# Altium PCB Hecquyn_PCB_Proto1_210521.PcbDoc
Units mil, origin at the board's own origin, x right, y up, seen from the top; angles counter-clockwise.
Board outline 1694 x 2355.81 mil, 2 copper layers (Top Layer, Bottom Layer); 39 components, 61 nets, 182 pads, 34 vias.
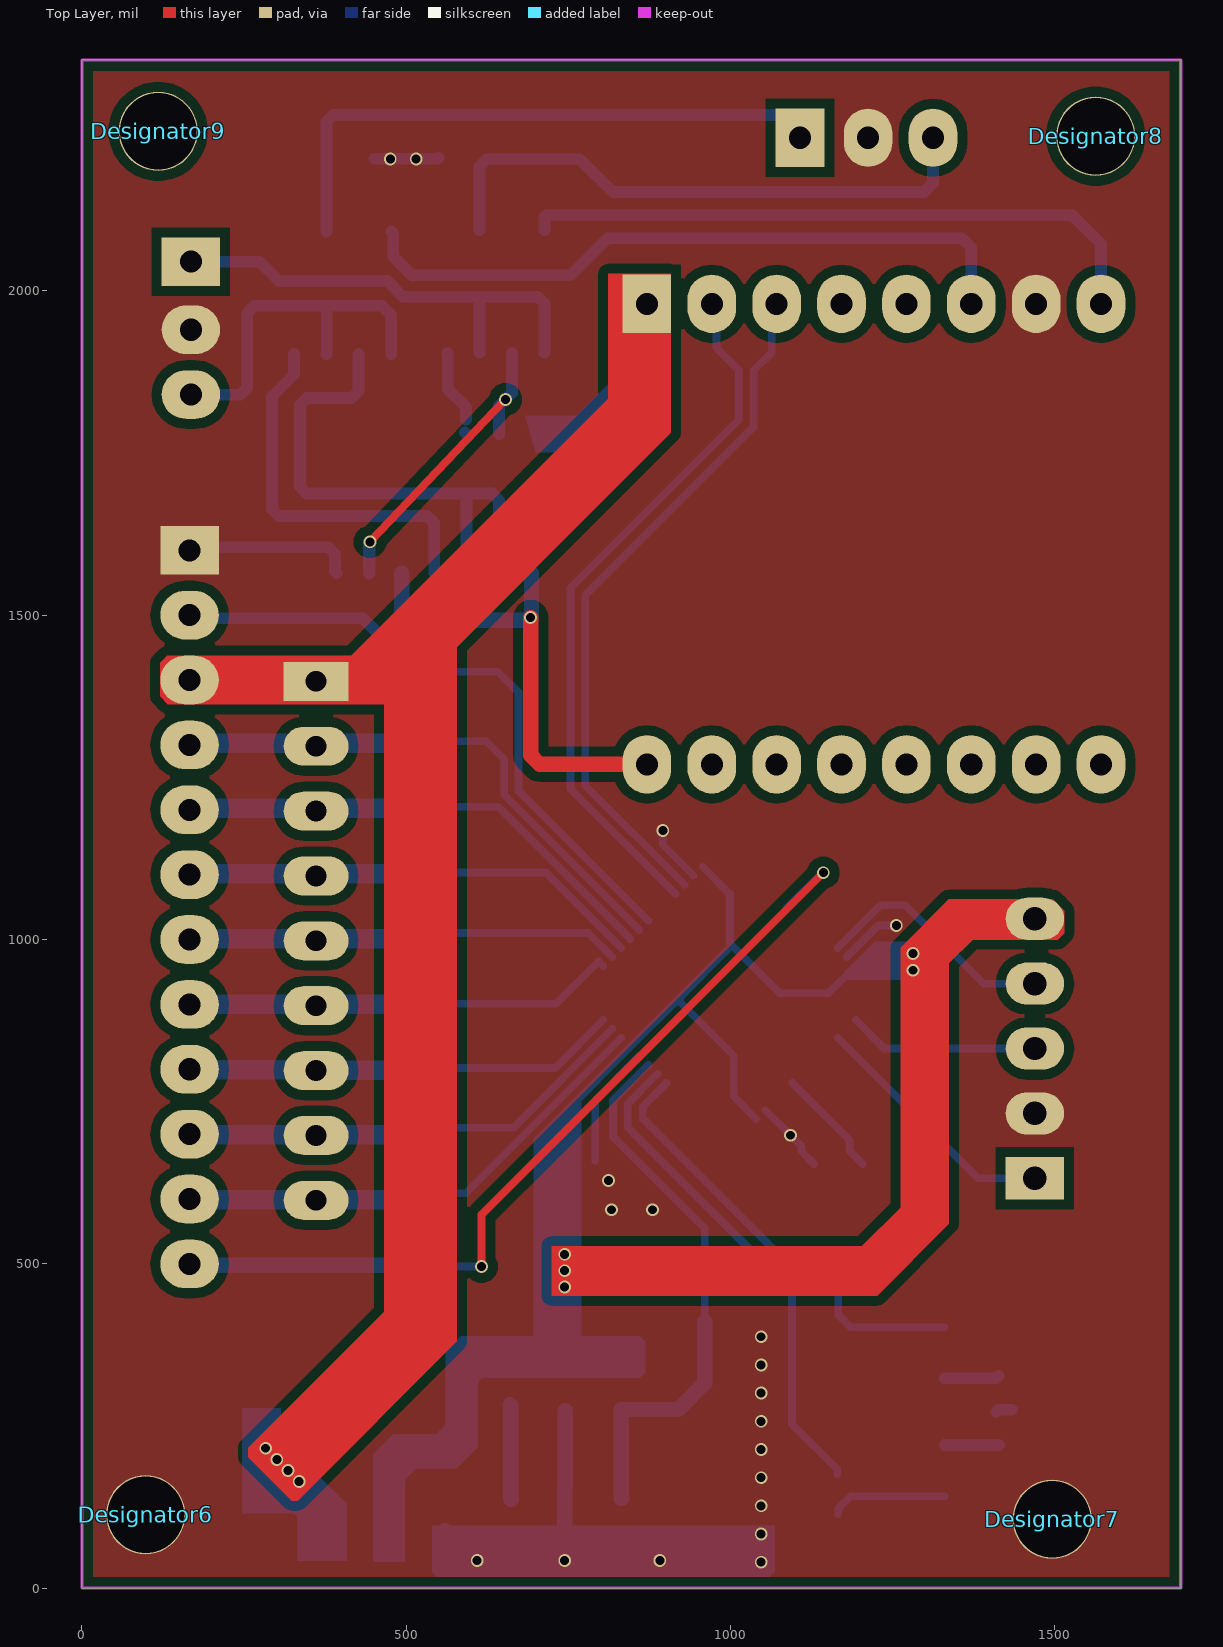
[diagram p0: Top Layer view]
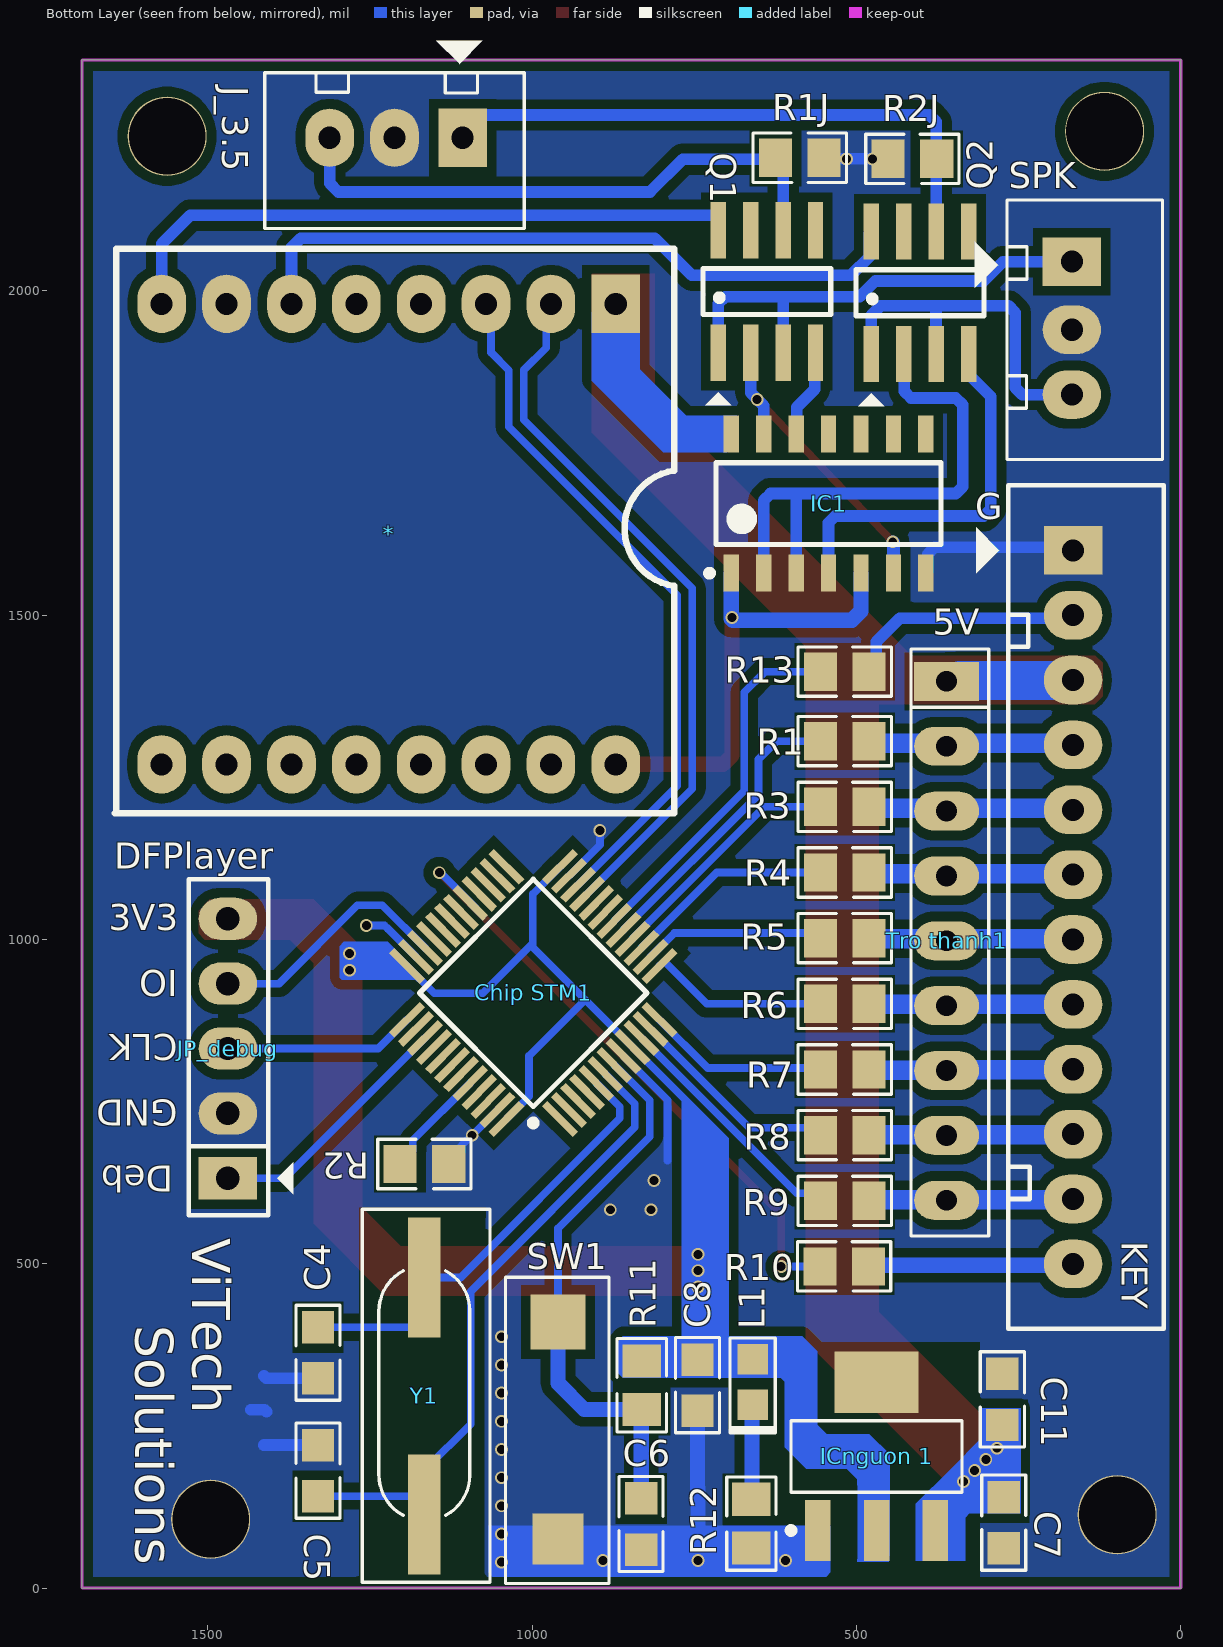
[diagram p1: Bottom Layer view, seen from below]
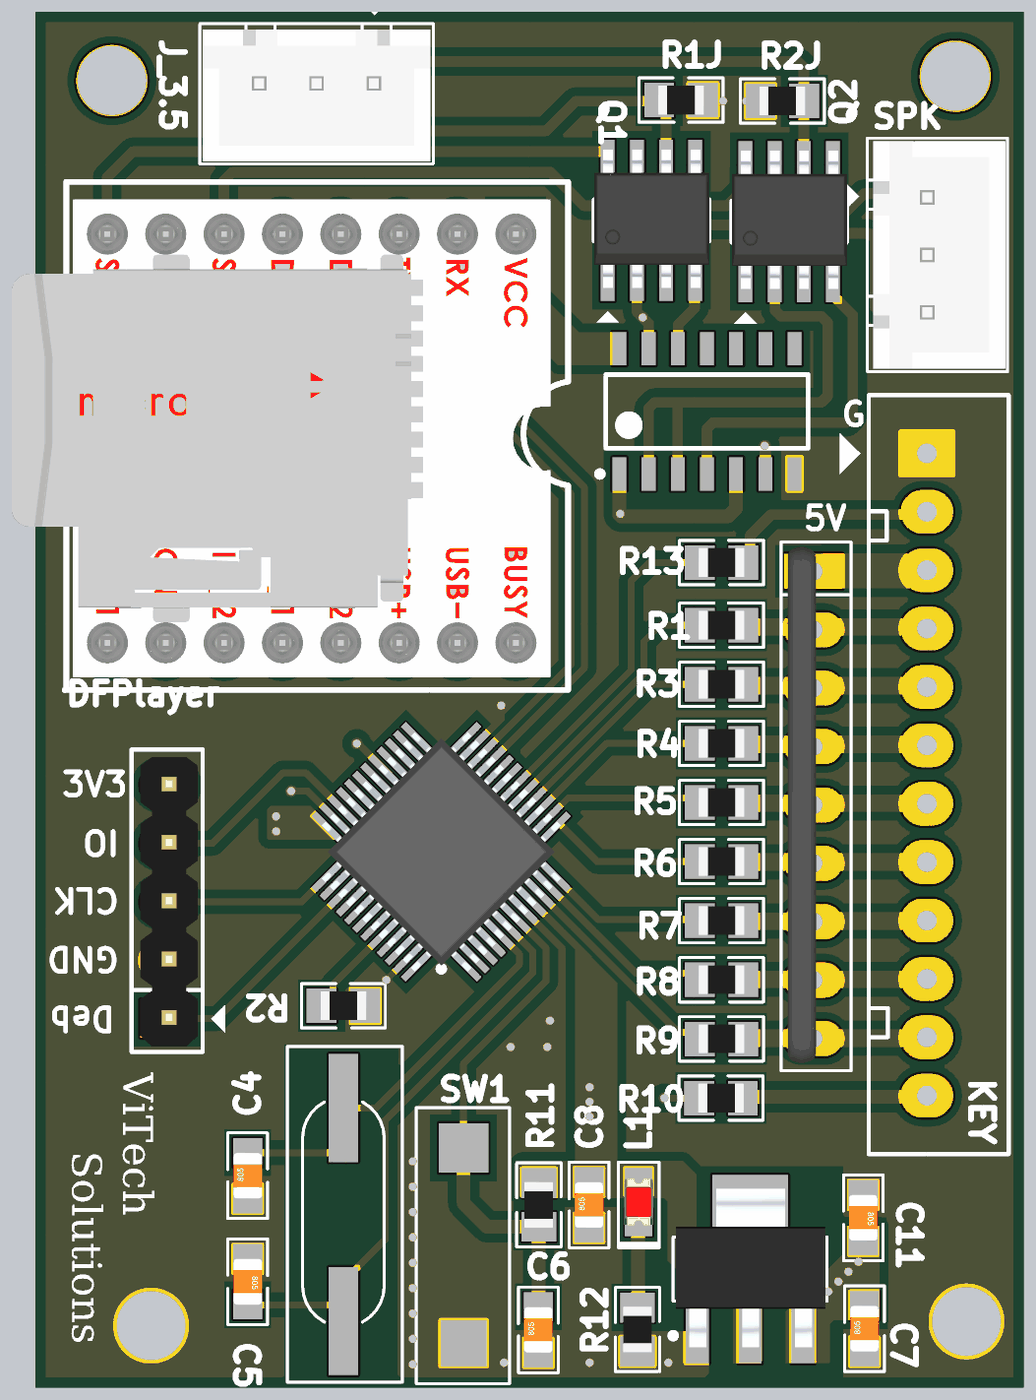
[diagram p2: 3D render of the assembled board from below, using the file's embedded part models]

## Layer stack, top to bottom
Top Solder: solder mask 0.4, Solder Resist, Dk 3.5
Top Layer: signal copper 1.4
Dielectric 1: dielectric 12.6, FR-4, Dk 4.8
Bottom Layer: signal copper 1.4
Bottom Solder: solder mask 0.4, Solder Resist, Dk 3.5

## Board outline
0,2355.81 0,0 1694,0 1694,2355.81

## Design rules (kind name [scope] priority, off if disabled: settings)
Clearance [All] p1: gap=15 ignorepadtopadclearanceinfootprint=FALSE
PolygonConnect PolygonConnect_1 [All] p1: connectstyle=Direct reliefconductorwidth=10 reliefentries=4 polygonreliefangle="90 Angle" airgapwidth=10
RoutingVias [All] p1: holewidth=13.78 width=19.68 viastyle="Through Hole" minholewidth=13.78 minwidth=19.68 maxholewidth=13.78 maxwidth=19.68
SolderMaskExpansion [All] p1: expansion=4 istentingtop=FALSE
Width [All] p1: maxlimit=30 minlimit=11.81 preferedwidth=18
30 further rules are at their usual default settings.

## Classes and differential pairs
component class "Principle Circuit": 45 * C4 C5 C6 C7 C8 C11 Check_card "Chip STM1" IC1 "ICnguon 1" J_3.5 JP_debug KEY L1 Q1 Q2 R1 R1J R2 R2J R3 R4 R5 R6 R7 R8 R9 R10 R11 R12 R13 SPK SW1 "Tro thanh1" Y1

## Components (designator, comment, footprint, x,y, rotation, side; value= is the part's Value field where it differs from the comment)
* "DFPlayer" DFplayer 871,1994.81 r0 bottom locked
C4 "22pF" CAP_0805 1330,362.81 r90 bottom
C5 "22pF" CAP_0805 1330,181.18 r270 bottom
C6 "0.1uF" CAP_0805 832,98.81 r90 bottom
C7 "0.1uF" CAP_0805 273,100.81 r90 bottom
C8 "0.1uF" CAP_0805 745,312.81 r90 bottom
C11 "0.1uF" CAP_0805 275,290.81 r270 bottom
"Chip STM1" "STM32F103C8T6" LQFP-48_19.6_393_58X11_SMD 998.26,917.51 r45 bottom
Designator6 "Comment" VIT 98.24,113.13 r0 top
Designator7 "Comment" VIT 1495.61,106.02 r0 top
Designator8 "Comment" VIT 1562.7,2238.19 r0 top
Designator9 "Comment" VIT 117.54,2245.68 r0 top
IC1 "7404" 74C04D 543,1671.81 r90 bottom
"ICnguon 1" "LM1117" SOT223-4N 469,202.97 r90 bottom
J_3.5 "JP3" CON3 1112,2235.81 r0 bottom (schematic designator Jack3.5)
JP_debug "JP5" JP5 1469,631.81 r90 bottom
KEY "JP12" CON12 166,1599.81 r270 bottom (schematic designator JP1)
L1 "RED LED" LED_0805 660,317.81 r90 bottom (schematic designator LED1)
Q1 "APM9926" SO-8 638,1998.81 r90 bottom
Q2 "APM9926" SO-8 402,1996.81 r90 bottom
R1 "1K" RES_0805 518,1305.59 r0 bottom
R1J "100Ohm" RES_0805 587.35,2204.96 r180 bottom (schematic designator R1_Jack)
R2 "10Kohm" RES_0805 1166,653.81 r0 bottom
R2J "100Ohm" RES_0805 413.72,2203.21 r0 bottom (schematic designator R2_Jack)
R3 "1K" RES_0805 518,1204.37 r0 bottom
R4 "1K" RES_0805 518,1103.14 r0 bottom
R5 "1K" RES_0805 518,1001.92 r0 bottom
R6 "1K" RES_0805 518,900.7 r0 bottom
R7 "1K" RES_0805 518,799.48 r0 bottom
R8 "1K" RES_0805 518,698.25 r0 bottom
R9 "1K" RES_0805 518,597.03 r0 bottom
R10 "1K" RES_0805 519,495.81 r0 bottom
R11 "10Kohm" RES_0805 831,312.81 r270 bottom
R12 "1K" RES_0805 662,99.45 r270 bottom
R13 "1K" RES_0805 518,1412.81 r0 bottom
SPK "" CON3 168,2039.81 r270 bottom (schematic designator Output)
SW1 "TACT SWITCH" SW_342_SMD 960,75.81 r270 bottom
"Tro thanh1" "10K" RN8 361,1397.81 r270 bottom
Y1 "8MHz" XTAL_314_240X47_SMD 1166,454.81 r270 bottom

## Footprints (in the part's own frame and the unit in brackets; to place one, negate y for a bottom-side part, rotate by r counter-clockwise, add the part's x,y. Pads: shape width x height; smd on the part's side, far side on the other; paste and mask are expansions set on the pad)
74C04D [mm] "SOP, 14-Leads, Body 8.65x3.90mm, Pitch 1.27mm, IPC Medium Density"
  rect 1.45x0.6 smd: 1(-2.725,3.81) 2(-2.725,2.54) 3(-2.725,1.27) 4(-2.725,0) 5(-2.725,-1.27) 6(-2.725,-2.54) 7(-2.725,-3.81) 8(2.725,-3.81) 9(2.725,-2.54) 10(2.725,-1.27) 11(2.725,0) 12(2.725,1.27) 13(2.725,2.54) 14(2.725,3.81)
  silkscreen extent -2.85,-4.4 1.6,4.79, body extent -2,-4.4 2,4.4, height 1.75
CAP_0805 [mil] "Ceramic Capacitor"
  rect 50x50 smd mask+3: 1(-39.37,0) 2(39.37,0)
  silkscreen extent -73,-34 73,34, body extent -39,-25 39,25, height 31
CON3 [mil] "CON 3"
  rect 75x90 hole 34: 1(-5,0)
  oval 75x90 hole 34: 2(100,0) 3(200,0)
  silkscreen extent -100,-150 300,140, body extent -95,-90 295,136, height 276
CON12 [mil] "CON12"
  rect 75x90 hole 34: 1(0,0)
  oval 75x90 hole 34: 2(100,0) 3(200,0) 4(300,0) 5(400,0) 6(500,0) 7(600,0) 8(700,0) 9(800,0) 10(900,0) 11(1000,0) 12(1100,0)
  silkscreen extent -100,-150 1200,140
DFplayer [mil]
  rect 75x90 hole 34: 1(0,15)
  oval 75x90 hole 34: 2(100,15) 3(200,15) 4(300,15) 5(400,15) 6(500,15) 7(600,15) 8(700,15) 9(700,725) 10(600,725) 11(500,725) 12(400,725) 13(300,725) 14(200,725) 15(100,725) 16(0,725)
  silkscreen extent -90,-70 773,800, body extent -60,-40 864,779, height 164
JP5 [mil] "JP5"
  rect 65x90 hole 36: 1(0,0)
  oval 65x90 hole 36: 2(100,0) 3(200,0) 4(300,0) 5(400,0)
  silkscreen extent -57,-101 461,60, body extent -48,-53 448,45, height 323
LED_0805 [mm] "LED"
  rect 1.2x1.2 smd mask+0.076: A(0.889,0) K(-0.889,0)
  silkscreen extent -1.99,-0.89 1.73,0.89, body extent -1.01,-0.62 1.01,0.63, height 1.1
LQFP-48_19.6_393_58X11_SMD [mm] "48LQFP"
  rect 1.7x0.3 smd mask+0.076: 1(-4.238,2.75) 2(-4.238,2.25) 3(-4.238,1.75) 4(-4.238,1.25) 5(-4.238,0.75) 6(-4.238,0.25) 7(-4.238,-0.25) 8(-4.238,-0.75) 9(-4.238,-1.25) 10(-4.238,-1.75) 11(-4.238,-2.25) 12(-4.238,-2.75) 25(4.238,-2.75) 26(4.238,-2.25) 27(4.238,-1.75) 28(4.238,-1.25) 29(4.238,-0.75) 30(4.238,-0.25) 31(4.238,0.25) 32(4.238,0.75) 33(4.238,1.25) 34(4.238,1.75) 35(4.238,2.25) 36(4.238,2.75)
  rect 0.3x1.7 smd mask+0.076: 13(-2.75,-4.238) 14(-2.25,-4.238) 15(-1.75,-4.238) 16(-1.25,-4.238) 17(-0.75,-4.238) 18(-0.25,-4.238) 19(0.25,-4.238) 20(0.75,-4.238) 21(1.25,-4.238) 22(1.75,-4.238) 23(2.25,-4.238) 24(2.75,-4.238) 37(2.75,4.238) 38(2.25,4.238) 39(1.75,4.238) 40(1.25,4.238) 41(0.75,4.238) 42(0.25,4.238) 43(-0.25,4.238) 44(-0.75,4.238) 45(-1.25,4.238) 46(-1.75,4.238) 47(-2.25,4.238) 48(-2.75,4.238)
  silkscreen extent -3.72,-3.15 3.15,3.72, body extent -4.5,-4.5 4.5,4.5, height 1.7
RES_0805 [mm] "Resister"
  rect 1.3x1.5 smd mask+0.076: 1(0.95,0) 2(-0.95,0)
  silkscreen extent -1.83,-0.97 1.83,0.97, body extent -1,-0.63 1,0.62, height 0.5
RN8 [mil] "R SIP8, 9 Pin"
  rect 60x100 hole 32: 1(0,0)
  oval 60x100 hole 32: 2(100,0) 3(200,0) 4(300,0) 5(400,0) 6(500,0) 7(600,0) 8(700,0) 9(800,0)
  silkscreen extent -50,-55 855,65, body extent -43,-44 843,5, height 259
SO-8 [mm] "8-Pin Small Outline Integrated Circuit 1.27 mm Pitch, IPC Medium Density"
  rect 2.2x0.6 smd: 1(-2.4,1.905) 2(-2.4,0.635) 3(-2.4,-0.635) 4(-2.4,-1.905) 5(2.4,-1.905) 6(2.4,-0.635) 7(2.4,0.635) 8(2.4,1.905)
  silkscreen extent -4.44,-2.5 0.9,2.5, body extent -2.93,-2.51 3.08,2.49, height 1.75
SOT223-4N [mm] "SOT223, 4-Leads, Body 6.5x3.5mm, Pitch 2.3mm, Lead Span 7mm, IPC Medium Density"
  rect 2.4x1 smd: 1(-2.9,2.3) 2(-2.9,0) 3(-2.9,-2.3)
  rect 2.4x3.3 smd: 4(2.9,0)
  silkscreen extent -3.02,-3.35 1.4,3.48, body extent -3.39,-3.27 3.5,3.23, height 1.72
SW_342_SMD [mm] "CASE: SMD"
  rect 2x2 smd: 1(0,0)
  rect 2.15x2.15 smd: 2(-8.5,0)
  silkscreen extent -10.25,-2.06 1.75,2, body extent -7.17,-1.79 -1.17,1.71, height 2.4
VIT [mm] "VIT"
  round 3.1 hole 3: VIT1(0,0)
XTAL_314_240X47_SMD [mil] "CASE: TH"
  rect 185x50 smd: 1(-24,0) 2(341,0)
  silkscreen extent -129,-96 446,101, body extent -118,-90 429,95, height 120

## Part data
*: library part Component_1
C4 C5: library part CAP_22pF-50V-5%-0805, "22pF ±5% 50V Ceramic Capacitor C0G, NP0 0805 (2012 Metric)"
C6 C7 C8 C11: library part CAP_0.1uF-50V-5%-0805, "0.1µF ±5% 50V Ceramic Capacitor X7R 0805 (2012 Metric)"
"Chip STM1": library part "IC-STM32F103C8T6 _1", "ARM® Cortex®-M3 STM32F1 Microcontroller IC 32-Bit 72MHz 64KB (64K x 8) FLASH"
IC1: "Hex Inverter"
"ICnguon 1": "3v3"
J_3.5 SPK: library part Con3, "Connector 3"
JP_debug: library part Con5, "Connector 5"
KEY: library part Con12, "Connector 12"
L1: library part LED-RED_10mA-0805, "Red 621nm LED Indication - Discrete 2V 0805 (2012 Metric)"
Q1 Q2: library part APM4953, "Dual P-Channel Enhancement Mode MOSFET"
R1 R1J R2J R3 R4 R5 R6 R7 R8 R9 R10 R12 R13: library part RES_1K-0.125W-1%-0805, "1 kOhms ±1% 0.125W, 1/8W Chip Resistor 0805 (2012 Metric) Moisture Resistant Thick Film"
R2: library part RES_10K-0.125W-1%-0805, "10 kOhms ±1% 0.125W, 1/8W Chip Resistor 0805 (2012 Metric) Moisture Resistant Thick Film"
R11: library part RES_10MOHM-0.125W-1%-0805, "10 MOhms ±1% 0.125W, 1/8W Chip Resistor 0805 (2012 Metric) Automotive AEC-Q200, High Voltage Thick Film"
SW1: library part SW_KSR223GLFG-SMD, "Tactile Switch SPST-NO Top Actuated Surface Mount"
"Tro thanh1": library part RN8, "Resistor 8 (Thanh)"
Y1: library part XTAL_8MHZ-LFXTAL030234, "Crystals 8MHz 22pF -20C 70C"

## Via types
v1: diameter 19.68, hole 13.78, Top Layer to Bottom Layer, tented both sides, 34 vias

## Nets (pads, with @x,y where several pads share a name; then routed paths per layer and width w, separated by ;. In a path a pad name is that pad's centre, name@x,y a point inside that pad or via, vN(x,y) a via of type N, cw(c..) or ccw(c..) an arc to the next point about the centre after c; other vN are vias at no path point)
3V3: "Chip STM1.9" "Chip STM1.24" "Chip STM1.36" "Chip STM1.48" "ICnguon 1.2" C8.2 JP_debug.5 L1.A R11.2 | length 1303.3
  Top Layer w18: 1322,989.1 1322.73,988.36
  Top Layer w30: 1320.34,987.44 1322,989.1
  Bottom Layer w11.81: 745.45,680.05 745.45,734.29 845.48,834.33 918.31,907.16 922.23,911.07 ; 956.84,1112.05 998.97,1069.92 998.97,993.93 ; 1039.69,722.97 1004.67,757.99 1004.67,820.8 922.23,903.24 922.23,911.07 ; 1192.8,958.93 1150.87,917 1075.89,917 998.97,993.93 ; v1@1281.18,952.64 v1(1281.33,952.5) ; 922.23,911.07 998.97,987.81 998.97,993.93
  Bottom Layer w30: 469,88.8 470,89.8 470,180.24 ; L1.A@651.37,351.81 L1.A@652.37,352.81 ; L1.A@660,351.51 829.7,351.51 R11.2 ; C8.2 C8.2@745.45,352.63
  other v1: 744.22,464.07 744.22,489.27 744.22,514.48 1281.33,978.24
5V: "ICnguon 1.3" "Tro thanh1.1" *.1 C7.2 C11.2 IC1.14 KEY.3 | length 529.8
  Top Layer w18: 361,1397.81 380.88,1397.81 401.88,1418.81 ; 871,1899.08 *.1
  Bottom Layer w30: C7.2 C7.2@274,141.18 ; 274,195.81 C7.2@274,141.18 ; C11.2@274,250.44 C11.2 ; 378.45,88.8 374.13,93.12 374.13,125.19 356.56,142.76 275.58,142.76 C7.2@274,141.18
  Bottom Layer w60: KEY.3 167,1398.81 340,1398.81 341,1397.81 361,1397.81
  other v1: 334.96,164.25 317.74,181.35 300.53,198.45 283.31,215.55
BUSY: *.16 IC1.1 IC1.5 | length 732.9
  Top Layer w23.62: v1@691.96,1496.35 691.96,1283.65 705.8,1269.81 *.16
  Bottom Layer w23.62: IC1.5 493,1505.94 506.84,1492.1 690.79,1492.1 693,1494.31 IC1.1
  other v1: 691.65,1496.35
CHECK_CARD: "Chip STM1.18" R13.1 | length 566.1
  Bottom Layer w11.81: R13.1 641,1412.81 673,1380.81 673,1228.85 873.32,1028.53
D_N: "Chip STM1.32"
D_P: "Chip STM1.33"
GND: "Chip STM1.8" "Chip STM1.23" "Chip STM1.35" "Chip STM1.47" "ICnguon 1.1" *.7 C4.1 C5.1 C6.1 C7.1 C8.1 C11.1 Designator6.VIT1 Designator7.VIT1 IC1.7 J_3.5.2 JP_debug.2 KEY.1 R1J.1 R2.2 R2J.1 R12.1 SPK.2 SW1.1 | length 1743.4
  Bottom Layer w11.81: 791.21,659.1 791.21,752.21 859.4,820.41 ; v1(895.56,1168.04) 895.22,1167.7 895.22,1145.83 942.92,1098.13 ; 1053.61,736.89 v1(1092.37,698.13) 1108.92,681.58 1108.92,673.49 R2.2 ; 1178.88,972.85 1222.03,1016 1227.59,1021.56 v1(1255.52,1021.56)
  Bottom Layer w18: KEY.1 170.69,1604.5 379.64,1604.5 390.19,1593.96 390.19,1567.34 IC1.7 ; R2J.1 548.19,2203.21 R1J.1 ; 1036.55,39.93 1037.03,39.93 ; C5.1 1413.28,220.55 1413.8,220.03 ; C4.1 1409.56,323.44 1413.36,327.24 ; 1409.31,271.99 1412.49,275.17 1433.93,275.17
  Bottom Layer w23.62: 559.55,88.8 559.55,61.24 578.11,42.68 v1(609.31,42.68) 614.89,48.26 648.22,48.26 663.76,63.81 726.96,63.81 742.89,47.88 744.28,47.88 744.28,153.71 745,154.43 C8.1 ; v1@745,48.6 821.16,48.6 C6.1 843.57,47.88 890.94,47.88 891.31,48.25 932.44,48.25 SW1.1
  other v1: 1047.15,39.92 744.28,42.68 890.94,42.68 1047.15,83.36 1047.15,126.8 1047.15,170.24 1047.15,213.68 1047.15,257.13 1047.15,300.57 1047.15,344.01 1047.15,387.45 816.53,583.26 879.45,583.26 811.98,628.33 475.39,2203.21 515.35,2203.21
L_3.5: J_3.5.1 Q2.6 R2J.2 | length 921.7
  Bottom Layer w18: Q2.6 377,2260.3 387.54,2270.84 1078.5,2270.84 1107,2242.34 J_3.5.1
L_DRF: IC1.2 IC1.3 Q2.2 | length 831.3
  Bottom Layer w18: Q2.2 426.39,1901.71 426.39,1845.11 415.85,1834.57 346.85,1834.57 336.31,1824.03 336.31,1697.81 346.85,1687.27 632.45,1687.27 643,1676.73 IC1.2 ; IC1.3 593,1685.69
L_SMP: IC1.4 Q2.4 | length 589.4
  Bottom Layer w18: Q2.4 327,1870.83 293.09,1836.92 293.09,1663.26 303.63,1652.72 532.45,1652.72 543,1642.18 IC1.4
Net*_6: *.6 Q2.8 | length 1059.4
  Bottom Layer w18: Q2.8 479.81,2088.49 479.81,2052.64 508.53,2023.92 753.68,2023.92 810.87,2081.11 1356.57,2081.11 1371,2066.68 *.6
Net*_8: *.8 Q1.8 | length 990.4
  Bottom Layer w18: Q1.8 713,2113.68 715.81,2116.49 1526.9,2116.49 1571,2072.39 *.8
"NetChip STM1_44": "Chip STM1.44" R2.1 | length 169.6
  Bottom Layer w11.81: 1095.36,778.65 1183.72,690.29 1183.72,673.49 R2.1
NetJP1_2: KEY.2 R13.2 | length 370.9
  Bottom Layer w18: KEY.2 170.91,1494.9 433.1,1494.9 469.25,1458.75 469.25,1424.16 R13.2
NetJP1_4: "Tro thanh1.2" KEY.4 R1.2 | length 317
  Bottom Layer w30: KEY.4 168.89,1302.7 477.71,1302.7 R1.2
NetJP1_5: "Tro thanh1.3" KEY.5 R3.2 | length 316.5
  Bottom Layer w30: KEY.5 168.28,1202.09 478.32,1202.09 R3.2
NetJP1_6: "Tro thanh1.4" KEY.6 R4.2 | length 316
  Bottom Layer w30: KEY.6 167.66,1101.47 478.94,1101.47 R4.2
NetJP1_7: "Tro thanh1.5" KEY.7 R5.2 | length 315.5
  Bottom Layer w30: KEY.7 167.05,1000.86 479.55,1000.86 R5.2
NetJP1_8: "Tro thanh1.6" KEY.8 R6.2 | length 315
  Bottom Layer w30: KEY.8 166.44,900.25 480.16,900.25 R6.2
NetJP1_9: "Tro thanh1.7" KEY.9 R7.2 | length 316.1
  Bottom Layer w30: KEY.9 167,798.81 360,798.81 361,797.81 361.83,798.64 479.77,798.64 R7.2
NetJP1_10: "Tro thanh1.8" KEY.10 R8.2 | length 315.2
  Bottom Layer w30: KEY.10 166.78,699.03 479.82,699.03 R8.2
NetJP1_11: "Tro thanh1.9" KEY.11 R9.2 | length 315.8
  Bottom Layer w30: KEY.11 167.39,598.42 479.21,598.42 R9.2
NetJP1_12: KEY.12 R10.2 | length 317.3
  Bottom Layer w23.62: KEY.12 168,497.81 479.6,497.81 R10.2
NetLED1_K: L1.K R12.2 | length 146.8
  Bottom Layer w23.62: L1.K 661,281.81 661,137.84 R12.2
NetOutput_1: Q1.1 Q1.3 SPK.1 | length 728.1
  Bottom Layer w18: SPK.1 274.06,2044.81 303.78,2015.09 470.69,2015.09 494.86,1990.92 609.93,1990.92 613,1987.85 ; 610.07,1990.78 702.45,1990.78 713,1980.24 Q1.1 ; Q1.3 613,1980.63
NetOutput_3: Q2.1 Q2.3 SPK.3 | length 566.8
  Bottom Layer w18: SPK.3 244.4,1839.81 254.94,1850.35 254.94,1966.03 265.48,1976.57 462.54,1976.57 477,1962.11 Q2.1 ; Q2.3 377.26,1902.58 377.26,1969.83
NRST: "Chip STM1.7" C6.2 R11.1 SW1.2 | length 855.2
  Bottom Layer w11.81: 873.32,806.49 818.73,751.9 818.73,695.95 960,554.68 SW1.2
  Bottom Layer w23.62: C6.2 831.5,138.69 831.5,274.9 R11.1 919.59,275.41 960,315.81 SW1.2
PA0: "Chip STM1.10" R9.1 | length 380.2
  Bottom Layer w11.81: R9.1 566.85,608.47 591.79,608.47 831.56,848.25
PA1: "Chip STM1.11" R8.1 | length 330.1
  Bottom Layer w11.81: R8.1 566.96,709.81 665.29,709.81 817.64,862.17
PA2: "Chip STM1.12" R7.1 | length 280.1
  Bottom Layer w11.81: R7.1 557.74,801.81 729.45,801.81 803.72,876.08
PA3: "Chip STM1.13" R6.1 | length 278.5
  Bottom Layer w11.81: R6.1 730.88,900.7 796.42,966.23 803.72,958.93
PA4: "Chip STM1.14" R5.1 | length 280.8
  Bottom Layer w11.81: R5.1 563.3,1009.81 780.69,1009.81 817.64,972.85
PA5: "Chip STM1.15" R4.1 | length 324.4
  Bottom Layer w11.81: R4.1 715.2,1103.14 831.56,986.77
PA6: "Chip STM1.16" R3.1 | length 374.4
  Bottom Layer w11.81: R3.1 641.81,1204.36 845.48,1000.69
PA7: "Chip STM1.17" R1.1 | length 456.6
  Bottom Layer w11.81: R1.1 623.22,1305.58 651,1277.81 651,1223.01 859.4,1014.61
PA8: "Chip STM1.29" R10.1 | length 963.4
  Top Layer w11.81: v1(616,495.81) 616,575.81 718.51,678.32 ; v1(1143,1102.81) 718.58,678.39 ; 718.51,678.32 cw(c782.09,614.89) 718.58,678.39 ; 718.51,678.32 718.58,678.39
  Bottom Layer w11.81: R10.1 v1(616,495.81) ; 1087,1048.81 1141,1102.81 v1(1143,1102.81)
PA9: "Chip STM1.30"
PA10: "Chip STM1.31"
PA15: "Chip STM1.38"
PB1: "Chip STM1.19"
PB3: "Chip STM1.39" JP_debug.1 | length 393.7
  Bottom Layer w11.81: 1164.96,848.25 1381.4,631.81 JP_debug.1
PB4: "Chip STM1.40"
PB5: "Chip STM1.41"
PB6: "Chip STM1.42"
PB7: "Chip STM1.43"
PB8: "Chip STM1.45"
PB9: "Chip STM1.46"
PB10: "Chip STM1.21" *.2 | length 1101.3
  Bottom Layer w11.81: 915.08,1070.29 753.15,1232.22 753.15,1541.53 1012.63,1801.01 1012.63,1877.78 978.18,1912.23 978.18,1972.63 *.2
PB11: "Chip STM1.22" *.3 | length 1081.1
  Bottom Layer w11.81: 929,1084.21 776.12,1237.09 776.12,1530.46 1035.82,1790.16 1035.82,1877.3 1063.29,1904.77 1063.29,1972.1 *.3
PB12: "Chip STM1.25"
PB13: "Chip STM1.26"
PB14: "Chip STM1.27"
PB15: "Chip STM1.28"
PC13: "Chip STM1.2"
R_3.5: J_3.5.3 Q1.6 R1J.2 | length 899
  Bottom Layer w18: Q1.6 613,2192.01 623.8,2202.81 767.66,2202.81 818.33,2152.14 1298.54,2152.14 1312,2165.6 J_3.5.3
R_DRF: IC1.6 IC1.13 Q1.2 | length 485.4
  Top Layer w11.81: v1(444.02,1612.89) 651.49,1830.9 v1(653,1832.48)
  Bottom Layer w18: IC1.13 643,1822.48 v1(653,1832.48) 663,1842.48 Q1.2
  Bottom Layer w19.68: IC1.6 443,1611.87 v1(444.02,1612.89)
R_SMP: IC1.12 Q1.4 | length 119.3
  Bottom Layer w18: Q1.4 564.17,1903.15 564.17,1848.19 592.2,1820.16 IC1.12@592.2,1801.08 ; IC1.12@590.19,1781.9 IC1.12
SWCLK: "Chip STM1.37" JP_debug.3 | length 294.5
  Bottom Layer w11.81: 1192.8,876.08 1237.07,831.81 JP_debug.3
SWDIO: "Chip STM1.34" JP_debug.4 | length 381.3
  Bottom Layer w11.81: 1164.96,986.77 1230.78,1052.59 1269.37,1052.59 1390.15,931.81 JP_debug.4
XTALA: "Chip STM1.5" C4.2 Y1.1 | length 702.1
  Bottom Layer w11.81: 901.16,778.65 864.66,742.15 864.66,724.06 1109.91,478.81 Y1.1 1166,421.28 1185.09,402.18 C4.2
XTALB: "Chip STM1.6" C5.2 Y1.2 | length 950.6
  Bottom Layer w11.81: 887.24,792.57 841.53,746.86 841.53,710.36 1094.65,457.24 1094.65,252.66 1164.41,182.9 Y1.2@1164.41,175.47 ; Y1.2 1166,122.72 1185.09,141.81 C5.2
pads on no net: "Chip STM1.1" "Chip STM1.3" "Chip STM1.4" "Chip STM1.20" "ICnguon 1.4" *.4 *.5 *.9 *.10 *.11 *.12 *.13 *.14 *.15 Designator8.VIT1 Designator9.VIT1 IC1.8 IC1.9 IC1.10 IC1.11 Q1.5 Q1.7 Q2.5 Q2.7

## Polygon pours and split planes (outlines as drawn)
GND on Top Layer "GND_L01_P001" (solid, pour order 1): 0,2355.81 0,0 1694,0 1694,2355.81
GND on Bottom Layer "GND_L02_P000" (solid, pour order 0): 0,2355.81 0,0 1694,0 1694,2355.81

## Keep-outs
Keep-Out Layer:
  the board outline again, w5

## Other copper
Top Layer:
  region net 3V3: 723.93,527.08 1202.37,527.08 1261.99,586.7 1261.99,986.93 1336.59,1061.53 1496.96,1061.53 1514.18,1044.31 1514.18,1009.51 1504.51,999.84 1373.4,999.84 1336.59,963.03 1336.59,561.4 1226.01,450.82 723.93,450.82
  region net 5V: 465.83,1326.63 465.83,426.12 256.27,216.56 256.27,201.98 323.72,134.53 332.53,134.53 578.17,380.17 578.17,1472.92 465.83,1406.8
  region net 5V: 145.95,1436.56 146.42,1437.03 415.02,1437.03 811.27,1833.28 811.27,2026.13 907.52,2026.13 907.99,2025.66 907.99,1780.83 489.87,1362.71 132.65,1362.71 120.64,1374.72 120.64,1426.1 131.56,1437.03 146.87,1437.03
Bottom Layer:
  pour cut-out: 851.02,920.83 851.02,914.35 1003.52,761.85 1016.39,761.85 1168.87,914.32 1016.62,1066.58 989.8,1066.58 982.07,1074.31
  pour cut-out: 1073.33,448.41 1073.33,19.56 1073.73,19.16 1267.36,19.16 1267.36,587.11 1070.82,587.11
  region net GND: 540.08,24.13 546.38,17.83 1060.36,17.83 1067.75,25.22 1067.75,96.36 540.08,96.36
  pour cut-out: 309.46,379.39 553.87,379.39 638.12,295.14 638.12,13.71 309.46,13.71
  region net 3V3: 1212.23,986.4 1222.26,996.43 1234.99,996.43 1290.03,996.27 1296.54,989.76 1296.54,940.72 1293.79,937.97 1171.84,937.97 1174.58,948.75
  region net 5V: 683.59,1806.65 684.02,1807.08 762.12,1807.08 834.24,1879.2 834.24,1967.97 834.67,1967.54 908.07,1967.54 908.07,1860.85 797.96,1750.74 699.38,1750.74
  region net 5V: 247.03,277.17 306.46,277.17 306.46,231.82 355.45,182.83 408.36,129.92 408.36,42.07 332.49,42.07 332.49,108.67 325.84,115.32 247.03,115.32
  region net 3V3: 448.87,55.74 448.87,205.99 480.09,237.21 545.87,237.21 560.67,252.01 560.67,364.93 583.87,388.13 860,388.13 868.09,380.04 868.09,332.25 860.33,324.49 616.91,324.49 610.5,318.08 610.5,217.37 577.06,183.93 514.61,183.93 498.38,167.7 498.07,148.74 498.07,49.44 498.37,40.74 450.37,40.74 449.17,41.94
  region net 3V3: 696.53,382.35 696.53,693.36 769.4,766.23 769.4,382.12

## Silkscreen, mask and mechanical layers (free items; w line width, h text height)
Bottom Overlay:
  text "G" at 317,1647.81 h40
  text "5V" at 382,1469.81 h40
  text "3V3" at 1652.63,1013.81 h40
  text "IO" at 1546,952.81 h40 r180
  text "CLK" at 1546,853.81 h40 r180
  text "GND" at 1546,752.81 h40 r180
  text "Deb" at 1553,650.81 h40 r180
  text "ViTech" at 1543.36,539.26 h100 r90
  text "Solutions" at 1630.89,405.22 h100 r90

## Dimensions
1743.07,2355.15 to 1712.73,7.63 on Top Overlay
1.42,2380.23 to 1696.97,2392.24 on Bottom Overlay